# Altium PCB PCB_POWER.PcbDoc (part 1 of 3)
Units mil, origin at the board's own origin, x right, y up, seen from the top; angles counter-clockwise.
Board outline 4410 x 2400 mil, 2 copper layers (Top Layer, Bottom Layer), stack 65.792 mil thick; 97 components, 67 nets, 301 pads, 107 vias.
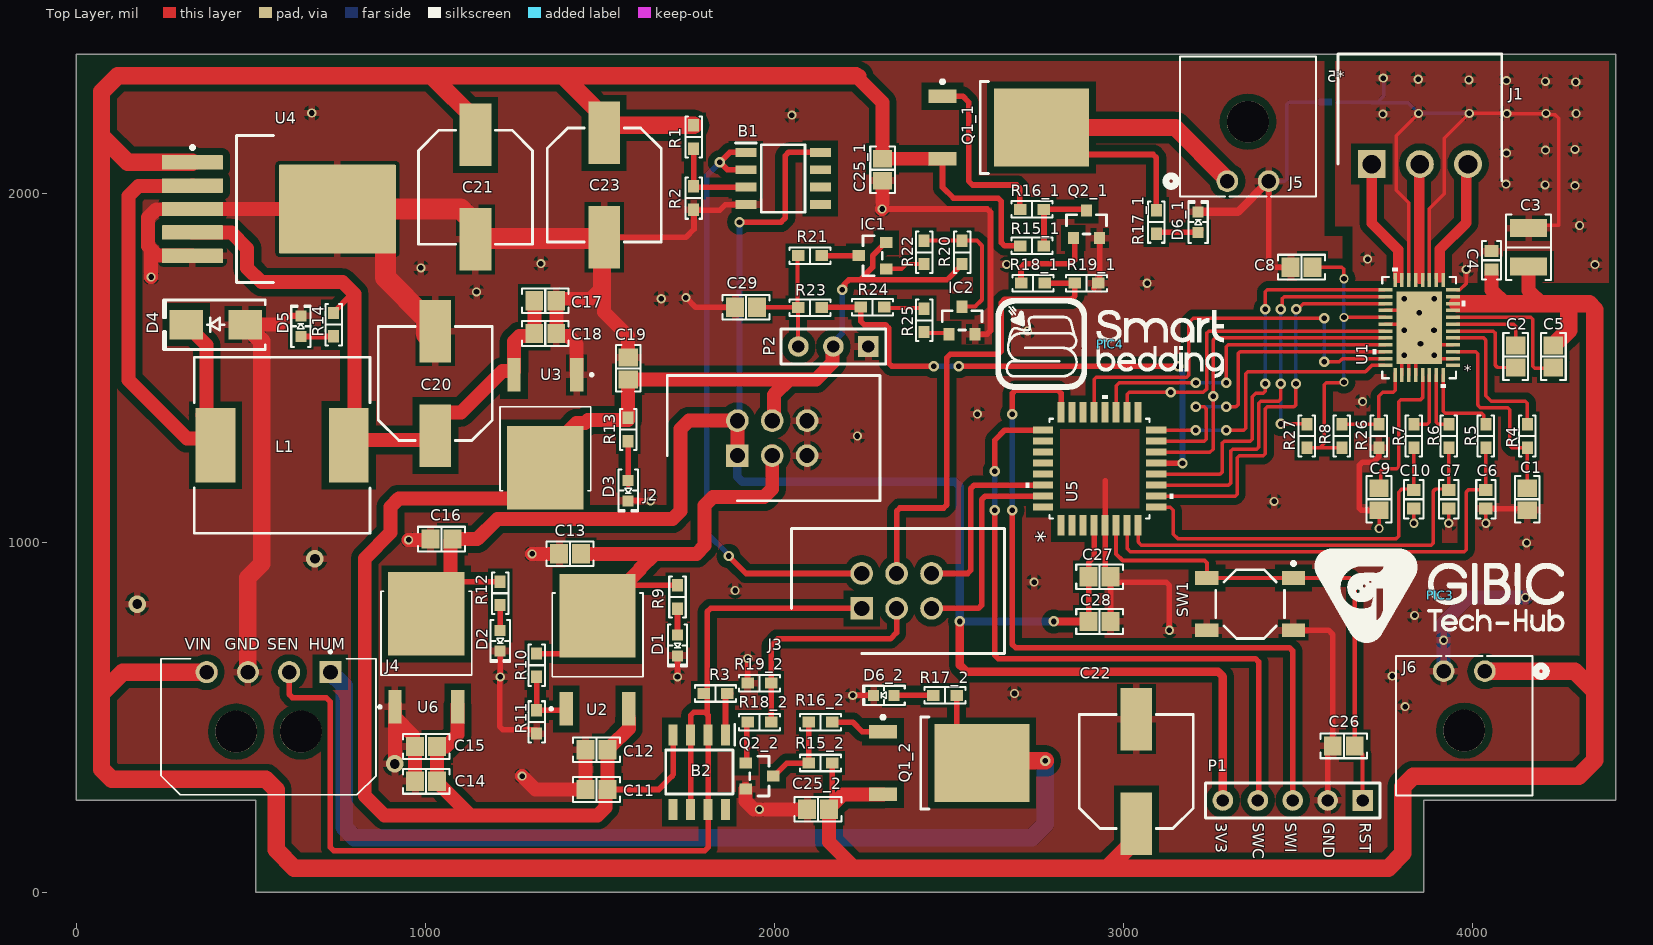
[diagram p0: Top Layer view]
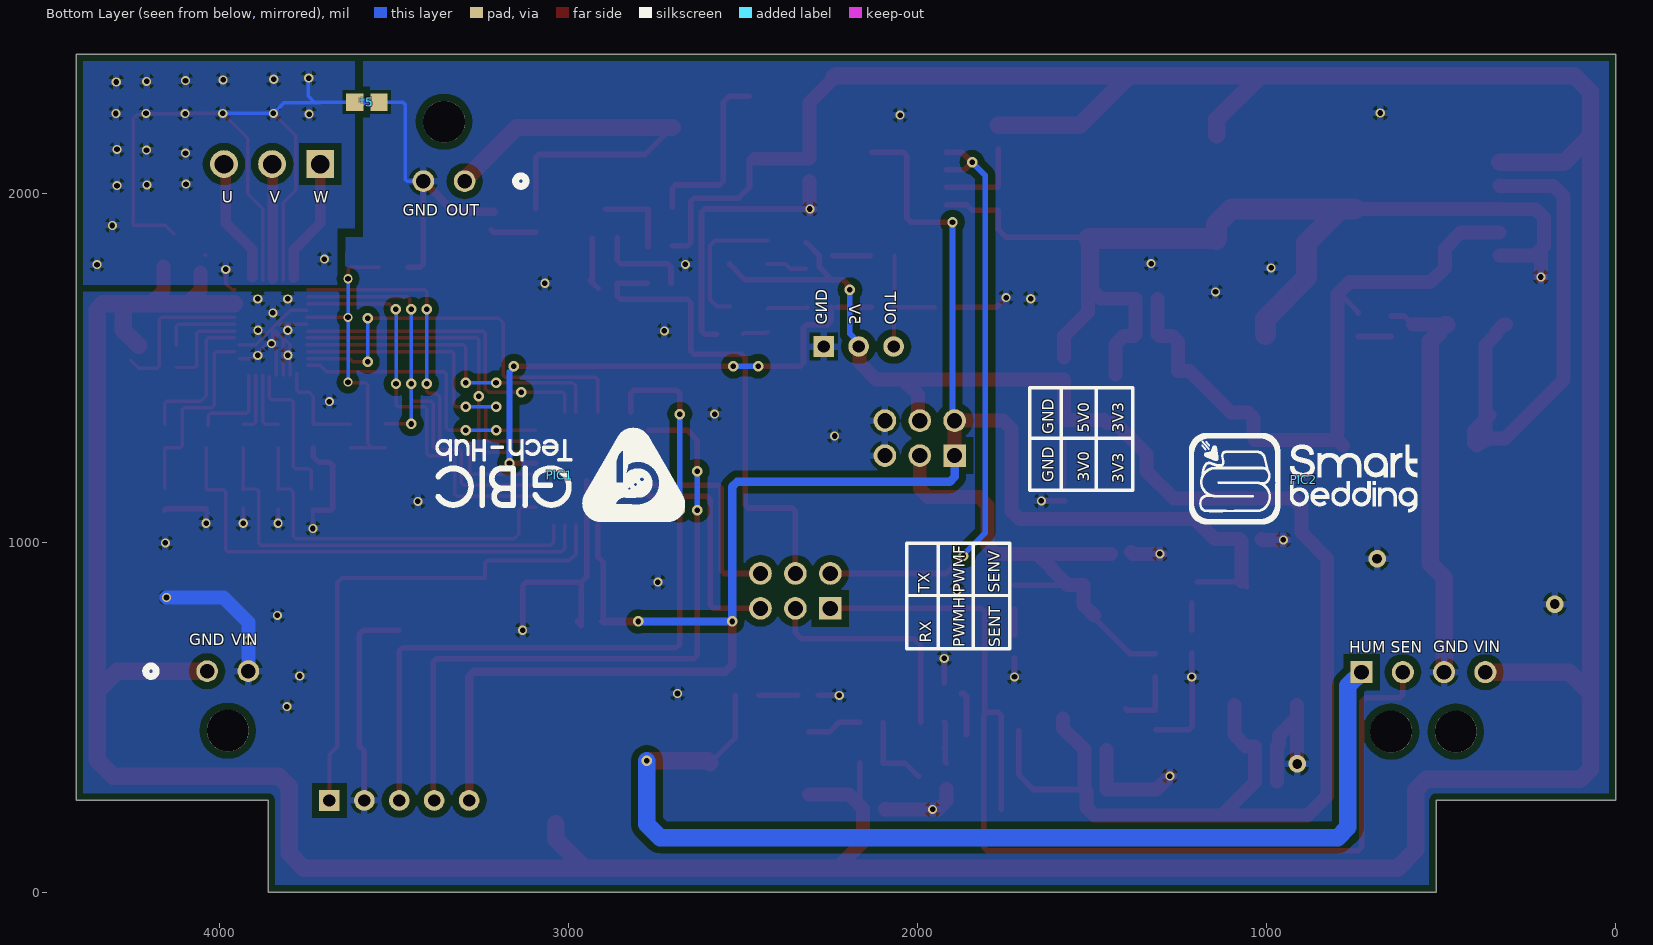
[diagram p1: Bottom Layer view, seen from below]
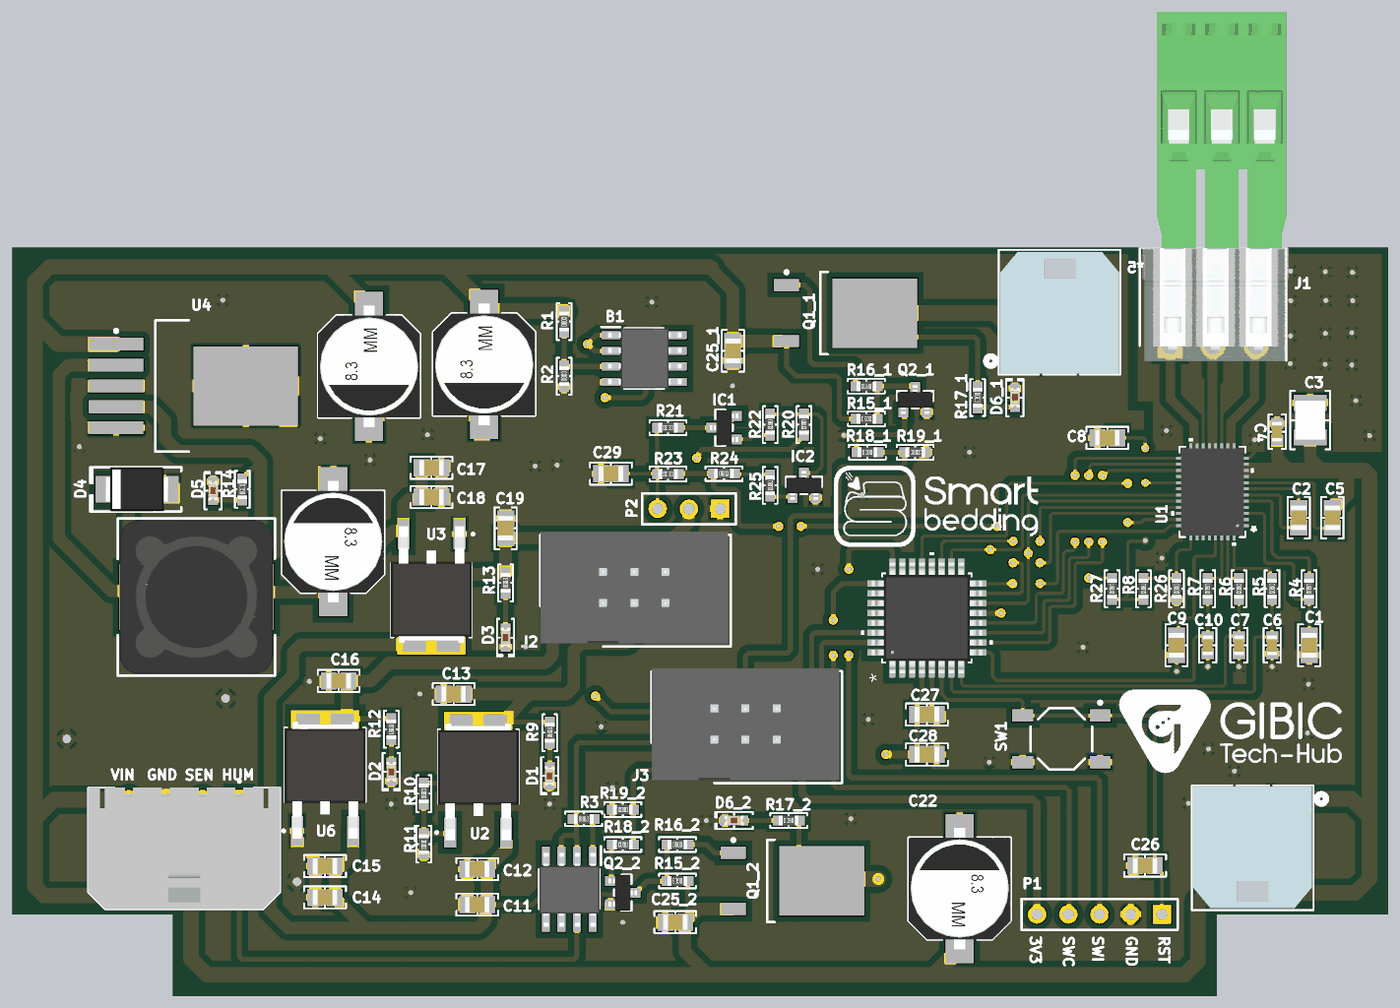
[diagram p3: 3D render of the assembled board from above, using the file's embedded part models]

## Layer stack, top to bottom
Top Solder: solder mask 0.4, Solder Resist, Dk 3.5
Top Layer: signal copper 1.4
Dielectric 1: dielectric 62.992, FR-4, Dk 4.8
Bottom Layer: signal copper 1.4
Bottom Solder: solder mask 0.4, Solder Resist, Dk 3.5

## Board outline
0,262.5 515,262.5 515,0 3860,0 3860,262.5 4410,262.5 4410,2400 0,2400

## Design rules (kind name [scope] priority, off if disabled: settings)
BoardOutlineClearance [All] p1: gap=20 ignorepadtopadclearanceinfootprint=FALSE
Clearance Clearance_1 [All] p1: gap=6 ignorepadtopadclearanceinfootprint=FALSE except(20: Arc-Poly Track-Poly SMDPad-Poly THPad-Poly Via-Poly Fill-Poly Poly-Poly Poly-Region Poly-Text)
Clearance [InNet('GND')] p2: gap=6 ignorepadtopadclearanceinfootprint=FALSE except(20: Arc-Poly Arc-Region Track-Poly Track-Region SMDPad-Poly SMDPad-Region THPad-Poly THPad-Region Via-Poly Via-Region Fill-Poly Fill-Region Poly-Poly Poly-Region Poly-Text Region-Region)
MinimumSolderMaskSliver [All] p1: minsoldermaskwidth=0
PolygonConnect [All] p1: connectstyle=Relief reliefconductorwidth=20 reliefentries=4 polygonreliefangle="90 Angle" airgapwidth=10
RoutingVias [All] p1: holewidth=28 width=56 viastyle="Through Hole" minholewidth=10 minwidth=20 maxholewidth=16 maxwidth=30
SilkToSilkClearance [All] p1: silktosilkclearance=4
SilkToSolderMaskClearance [IsPad] p1: minsilkscreentomaskgap=0 clearancetoexposedcopper=TRUE
SolderMaskExpansion [All] p1: expansion=4 istentingtop=FALSE
Width [All] p1: maxlimit=100 minlimit=10 preferedwidth=16
27 further rules are at their usual default settings.

## Classes and differential pairs
channel class PowerOut: "U_PowerOut 11" "U_PowerOut 12"
component class "U_PowerOut 12": C25_2 D6_2 Q1_2 Q2_2 R15_2 R16_2 R17_2 R18_2 R19_2
component class U_BLDC_ext: C29 IC1 IC2 J6 P2 R20 R21 R22 R23 R24 R25
component class TopLevel: J2 J3 J4 J5 PIC1 PIC2 PIC3 PIC4
component class U_MCU: C26 C27 C28 P1 SW1 U5
component class U_Sensors: *3 B1 B2 R1 R2 R3
component class "U_PowerOut 11": C25_1 D6_1 Q1_1 Q2_1 R15_1 R16_1 R17_1 R18_1 R19_1
component class U_Supply_12V: C20 C21 C22 C23 D4 D5 L1 R14 U4
component class U_Supply_5V0: C17 C18 C19 D3 R13 U3
component class U_Supply_3V3: C14 C15 C16 D2 R12 U6
component class U_Supply_3V0: C11 C12 C13 D1 R9 R10 R11 U2
component class U_BLDC: *5 C1 C2 C3 C4 C5 C6 C7 C8 C9 C10 J1 R4 R5 R6 R7 R8 R26 R27 U1

## Components (designator, comment, footprint, x,y, rotation, side; value= is the part's Value field where it differs from the comment)
*5 "NT_1" Net_Tie 3692.5,2207.57 r180 bottom net-tie
B1 "LM358M" SOIC127P600X175-8N 2025,2043.75 r0 top
B2 "LM334MX" SOIC127P600X175-8N 1784.99,343.75 r270 top
C1 "22µF" "CAP 0805_2012" 4156.25,1125 r270 top
C2 "47 pF" "CAP 0805_2012" 4122.83,1533.89 r270 top
C3 "10µF" "CAP 1210_3225 - 2.8MM" 4159.69,1846.57 r270 top
C4 "0.1 µF" "CAP 0603_1608" 4053.56,1809.46 r90 top
C5 "Value" "CAP 0805_2012" 4230.86,1533.89 r270 top
C6 "33pF" "CAP 0603_1608" 4037.5,1125 r90 top
C7 "33pF" "CAP 0603_1608" 3931.25,1125 r90 top
C8 "Value" "CAP 0805_2012" 3509.61,1789.79 r180 top
C9 "Value" "CAP 0805_2012" 3731.25,1125 r270 top
C10 "33pF" "CAP 0603_1608" 3831.25,1125 r90 top
C11 "10µF" "CAP 0805_2012" 1490.3,293.75 r180 top
C12 "Value" "CAP 0805_2012" 1490.3,407.56 r180 top
C13 "10µF" "CAP 0805_2012" 1414.76,968.75 r180 top
C14 "10µF" "CAP 0805_2012" 1002.63,317.14 r180 top
C15 "Value" "CAP 0805_2012" 1002.63,417.14 r180 top
C16 "10µF" "CAP 0805_2012" 1046.38,1010.89 r180 top
C17 "10µF" "CAP 0805_2012" 1343.75,1693.75 r0 top
C18 "Value" "CAP 0805_2012" 1343.75,1600 r0 top
C19 "10µF" "CAP 0805_2012" 1581.25,1500 r90 top
C20 "220 µF" "CAP ALSMD 8.3MM H10.5MM" 1028.78,1456.69 r90 top
C21 "330 µF" "CAP ALSMD 8.3MM H10.5MM" 1143.75,2018.75 r270 top
C22 "330 µF" "CAP ALSMD 8.3MM H10.5MM" 3036.42,345.47 r90 top
C23 "330 µF" "CAP ALSMD 8.3MM H10.5MM" 1512.5,2025 r270 top
C25_1 "22 µF" "CAP 0805_2012" 2309.83,2068.75 r270 top (schematic designator C25)
C25_2 "22 µF" "CAP 0805_2012" 2125,237.5 r180 top (schematic designator C25)
C26 "0.1 µF" "CAP 0805_2012" 3630.62,418.7 r0 top
C27 "0.1 µF" "CAP 0805_2012" 2931.4,903.25 r180 top
C28 "4.7 µF" "CAP 0805_2012" 2931.4,774.99 r180 top
C29 "4.7 µF" "CAP 0805_2012" 1918.75,1675 r0 top
D1 "Red" "LED 0603_1608 RED" 1722.49,706.25 r270 top
D2 "Red" "LED 0603_1608 RED" 1214.73,719.6 r270 top
D3 "Red" "LED 0603_1608 RED" 1581.25,1149.7 r270 top
D4 "ACDBB540-HF" "DO214AA SMB" 400,1625 r180 top
D5 "Red" "LED 0603_1608 RED" 643.75,1620.47 r90 top
D6_1 "Red" "LED 0603_1608 RED" 3213.48,1918.75 r90 top (schematic designator D6)
D6_2 "Red" "LED 0603_1608 RED" 2313.29,563.43 r180 top (schematic designator D6)
IC1 "NDS0610" "ON SEMI SOT-23-3" 2281.1,1822.44 r180 top
IC2 "2N7002" "ON SEMI SOT-23-3" 2537.5,1637.5 r90 top
J1 "691322110003" SHDRRA3W80P0X350_1X3_1190X920X700P 3710.82,2085 r0 top
J2 "61200621621" SHDR6W64P254_2X3_1528X910X910P 1893.75,1250 r0 top
J3 "61200621621" SHDR6W64P254_2X3_1528X910X910P 2250,812.5 r0 top
J4 "0436500400" MOLEX_0436500400 551.18,459.71 r0 top
J5 "436500200" CONN_SD-43650-001_02_MOL 3297.19,2036.17 r180 top
J6 "436500200" CONN_SD-43650-001_02_MOL 4034.69,632.58 r0 top
L1 "33 µH" "BOURNS SRR1280" 590.13,1279.64 r0 top
P1 "Header 5" HDR1X5 3684.5,262.45 r180 top
P2 "Header 3" HDR1X3 2268.75,1562.5 r180 top
PIC1 "GTH_Silk" TECHHUB_SILK 3025,1193.75 r0 bottom
PIC2 "SB2_Silk" SMARTBEDDING2_SILK 893.75,1181.25 r180 bottom
PIC3 "GTH_Silk" TECHHUB_SILK 3906.25,850 r0 top
PIC4 "SB2_Silk" SMARTBEDDING2_SILK 2962.5,1568.75 r0 top
Q1_1 "IPD068P03L3 G" INF-PG-TO252-3-1_M 2670.23,2189.73 r0 top (schematic designator Q1)
Q1_2 "IPD068P03L3 G" INF-PG-TO252-3-1_M 2500,369.68 r0 top (schematic designator Q1)
Q2_1 "2N7002" "ON SEMI SOT-23-3" 2893.75,1912.5 r90 top (schematic designator Q2)
Q2_2 "2N7002" "ON SEMI SOT-23-3" 1956.99,332.18 r0 top (schematic designator Q2)
R1 "270 kOhms" "YAGEO RES 0603_1608" 1768.75,2162.5 r90 top
R2 "30 kOhms" "YAGEO RES 0603_1608" 1768.75,1987.5 r90 top
R3 "33 Ohms" "YAGEO RES 0603_1608" 1831.53,568.8 r0 top
R4 "22 Ohms" "YAGEO RES 0603_1608" 4156.25,1306.25 r270 top
R5 "1 kOhms" "YAGEO RES 0603_1608" 4037.5,1306.25 r270 top
R6 "1 kOhms" "YAGEO RES 0603_1608" 3931.25,1306.25 r270 top
R7 "1 kOhms" "YAGEO RES 0603_1608" 3831.25,1306.25 r270 top
R8 "47 kOhms" "YAGEO RES 0603_1608" 3625,1306.25 r270 top
R9 "10 kOhms" "YAGEO RES 0603_1608" 1722.49,844.93 r90 top
R10 "120 Ohms" "YAGEO RES 0603_1608" 1318.9,649.66 r90 top
R11 "169 Ohms" "YAGEO RES 0603_1608" 1318.9,487.5 r270 top
R12 "10 kOhms" "YAGEO RES 0603_1608" 1214.73,855.82 r90 top
R13 "10 kOhms" "YAGEO RES 0603_1608" 1581.25,1325 r90 top
R14 "10 kOhms" "YAGEO RES 0603_1608" 737.5,1625 r90 top
R15_1 "10 kOhms" "YAGEO RES 0603_1608" 2737.5,1850.84 r0 top (schematic designator R15)
R15_2 "10 kOhms" "YAGEO RES 0603_1608" 2131.99,369.68 r180 top (schematic designator R15)
R16_1 "47 Ohms" "YAGEO RES 0603_1608" 2737.5,1955.59 r180 top (schematic designator R16)
R16_2 "47 Ohms" "YAGEO RES 0603_1608" 2131.99,486.61 r0 top (schematic designator R16)
R17_1 "10 kOhms" "YAGEO RES 0603_1608" 3093.75,1918.75 r270 top (schematic designator R17)
R17_2 "10 kOhms" "YAGEO RES 0603_1608" 2488.29,563.43 r180 top (schematic designator R17)
R18_1 "47 Ohms" "YAGEO RES 0603_1608" 2740.7,1743.76 r180 top (schematic designator R18)
R18_2 "47 Ohms" "YAGEO RES 0603_1608" 1956.99,486.61 r180 top (schematic designator R18)
R19_1 "10 kOhms" "YAGEO RES 0603_1608" 2893.75,1743.76 r0 top (schematic designator R19)
R19_2 "10 kOhms" "YAGEO RES 0603_1608" 1956.99,598.38 r180 top (schematic designator R19)
R20 "10 kOhms" "YAGEO RES 0603_1608" 2537.5,1832.28 r270 top
R21 "180 Ohms" "YAGEO RES 0603_1608" 2101.69,1822.44 r180 top
R22 "47 Ohms" "YAGEO RES 0603_1608" 2429.04,1832.28 r270 top
R23 "0 Ohms" "YAGEO RES 0603_1608" 2101.69,1673.89 r180 top
R24 "0 Ohms" "YAGEO RES 0603_1608" 2281.1,1675 r0 top
R25 "47 Ohms" "YAGEO RES 0603_1608" 2429.04,1637.5 r270 top
R26 "0 Ohms" "YAGEO RES 0603_1608" 3731.25,1306.25 r270 top
R27 "47 kOhms" "YAGEO RES 0603_1608" 3525,1306.25 r270 top
SW1 "TL3342F160QG" ESWI-TL3342F160QG_V 3362.5,825 r270 top
U1 "DRV8316CTRGFR" VQFN40_RGF_TEX 3846.4,1616.5 r180 top locked
U2 "LD1117DTC-R" DPAK456P1010X240-3N 1493.5,693.75 r90 top
U3 "LD1117DT50CTR" DPAK456P1010X240-3N 1343.75,1312.5 r270 top
U4 "" KTT0005B_M 581.25,1956.25 r0 top
U5 "STM32G030K8T6" LQFP-32 2931.25,1212.5 r90 top
U6 "" DPAK456P1010X240-3N 1003.07,699.13 r90 top

## Footprints (in the part's own frame and the unit in brackets; to place one, negate y for a bottom-side part, rotate by r counter-clockwise, add the part's x,y. Pads: shape width x height; smd on the part's side, far side on the other; paste and mask are expansions set on the pad)
"BOURNS SRR1280" [mm] "Precision Wire Wound Inductor, 2-Leads, Body 12.50x12.50mm, IPC Medium Density"
  rect 2.9x5.4 smd: 1(-4.85,0) 2(4.85,0)
  silkscreen extent -6.4,-6.4 6.4,6.4, body extent -6.25,-6.25 6.25,6.25, height 7.9
"CAP 0603_1608" [mm] "Chip Capacitor, 2-Leads, Body 1.60x0.80mm, IPC Medium Density"
  rect 0.9x1 smd: 1(-0.675,0) 2(0.675,0)
  silkscreen extent -1.4,-0.7 1.4,0.7, body extent -0.8,-0.41 0.8,0.41, height 0.82
"CAP 0805_2012" [mm] "Chip Capacitor, 2-Leads, Body 2.00x1.20mm, IPC Medium Density"
  rect 1.3x1.4 smd: 1(-0.8,0) 2(0.8,0)
  silkscreen extent -1.7,-0.9 1.7,0.9, body extent -1,-0.64 1,0.64, height 1.26
"CAP 1210_3225 - 2.8MM" [mm] "Chip Capacitor, 2-Leads, Body 3.20x2.50mm, IPC Medium Density"
  rect 1.3x2.7 smd: 1(-1.4,0) 2(1.4,0)
  silkscreen extent -2.37,-1.63 2.37,1.63, body extent -1.6,-1.25 1.6,1.25, height 2.8
"CAP ALSMD 8.3MM H10.5MM" [mm] "Aluminum Electrolytic Capacitor, Body 8.30x8.30x10.50mm, IPC Low Density"
  rect 4.55x2.3 smd: 1(-3.8,0) 2(3.8,0)
  silkscreen extent -4.15,-4.15 4.15,4.15, body extent -4.95,-4.15 4.95,4.15, height 10.5
CONN_SD-43650-001_02_MOL [mil]
  round 62 / inner round 60 / far side round 62 hole 42 paste-99999 mask+0: 1(0,0) 2(-118.11,0)
  round 120 / inner round 60 / far side round 120 hole 120 unplated paste-99999 mask-60: 3(-59.06,-170.08)
  silkscreen extent -254,-356 176,44, body extent -250,-350 130,40, height 221
"DO214AA SMB" [mm] "Molded Diode, 2-Leads, Body 4.31x3.62mm, IPC Medium Density"
  rect 2.45x2.15 smd: 1(-2.15,0) 2(2.15,0)
  silkscreen extent -3.6,-1.8 3.8,1.8, body extent -2.6,-1.8 2.6,1.8, height 2.4
DPAK456P1010X240-3N [mm]
  rect 2.44x0.97 smd: 1(-4.29,2.28) 3(-4.29,-2.28)
  rect 6.07x5.55 smd paste-4: 4(2.48,0)
  silkscreen extent -4.39,-3.3 4.14,3.48, body extent -4.95,-3.3 4.58,3.3, height 2.3
ESWI-TL3342F160QG_V [mm] "SMD, 4-Leads, Body 5x5mm, Pitch 6.3mm"
  rect 1x1.7 smd: 1(-1.9,3.15) 2(-1.9,-3.15) 3(1.9,3.15) 4(1.9,-3.15)
  silkscreen extent -3.07,-2.5 2.5,3.28, body extent -2.5,-2.5 2.5,2.5, height 1.5
HDR1X3 [mm] "Connector; Header; 3 Position"
  rect 1.5x1.5 hole 0.9: 1(0,0)
  round 1.5 hole 0.9: 2(2.54,0) 3(5.08,0)
  silkscreen extent -1.27,-1.27 6.35,1.27
HDR1X5 [mm] "Connector; Header; 5 Position"
  rect 1.5x1.5 hole 0.9: 1(0,0)
  round 1.5 hole 0.9: 2(2.54,0) 3(5.08,0) 4(7.62,0) 5(10.16,0)
  silkscreen extent -1.27,-1.27 11.43,1.27
INF-PG-TO252-3-1_M [mm] "DPAK, 3-Leads, Body 6.525x6.12mm, Pitch 2.28mm, IPC Low Density"
  rect 2.05x1 smd: 1(-4.8,2.28) 3(-4.8,-2.28)
  rect 6.9x5.65 smd: 2(2.4,0)
  silkscreen extent -4.92,-3.35 -1.45,3.45, body extent -2.05,-3.32 4.17,3.32, height 2.35
KTT0005B_M [mm] "DPAK, 5-Leads, Body 10.65x9.65mm, Pitch 1.7mm, IPC Low Density"
  rrect10% 4.45x1.05 smd: 1(-6.3,3.4) 2(-6.3,1.7) 3(-6.3,0) 4(-6.3,-1.7) 5(-6.3,-3.4)
  rrect2% 8.5x6.45 smd: 6(4.25,0)
  silkscreen extent -6.42,-5.35 -0.4,5.35, body extent -3.1,-5.32 6.55,5.33, height 4.83
"LED 0603_1608 RED" [mm] "Chip Diode, 2-Leads, Body 1.60x0.80mm, IPC Medium Density"
  rect 0.8x0.8 smd: 1(-0.75,0) 2(0.75,0)
  silkscreen extent -1.52,-0.7 1.52,0.7, body extent -0.8,-0.4 0.8,0.4, height 0.53
LQFP-32 [mil]
  rect 58x20 smd paste+0 mask+0: 1(-162,110.24) 2(-162,78.74) 3(-162,47.24) 4(-162,15.75) 5(-162,-15.75) 6(-162,-47.24) 7(-162,-78.74) 8(-162,-110.24) 17(162,-110.24) 18(162,-78.74) 19(162,-47.24) 20(162,-15.75) 21(162,15.75) 22(162,47.24) 23(162,78.74) 24(162,110.24)
  rect 20x58 smd paste+0 mask+0: 9(-110.24,-162) 10(-78.74,-162) 11(-47.24,-162) 12(-15.75,-162) 13(15.75,-162) 14(47.24,-162) 15(78.74,-162) 16(110.24,-162) 25(110.24,162) 26(78.74,162) 27(47.24,162) 28(15.75,162) 29(-15.75,162) 30(-47.24,162) 31(-78.74,162) 32(-110.24,162)
  silkscreen extent -143,-211 211,211, body extent -177,-177 177,177, height 63
MOLEX_0436500400 [mm]
  rect 1.605x1.605 hole 1.07: 1(4.5,4.32)
  round 1.605 hole 1.07: 2(1.5,4.32) 3(-1.5,4.32) 4(-4.5,4.32)
  round 3.05 hole 3.05 unplated: ""(-2.35,0) ""(2.35,0)
  silkscreen extent -7.83,-4.6 7.83,5.92, body extent -7.83,-4.57 7.83,5.33, height 4.89
Net_Tie [mil]
  rect 50x50 smd: 1(80,55) 2(150,55)
  Top Layer region: 95,65 135,65 135,45 95,45
"ON SEMI SOT-23-3" [mm] "SOT23, 3-Leads, Body 2.90x2.40mm, Pitch 0.95mm, IPC Medium Density"
  rect 0.9x0.8 smd: 1(-1,0.95) 2(-1,-0.95) 3(1,0)
  silkscreen extent -0.7,-1.45 0.7,1.45, body extent -1.16,-1.45 1.16,1.45, height 1
SHDR6W64P254_2X3_1528X910X910P [mm]
  rect 1.65x1.65 / inner round 1.65 / far side rect 1.65x1.65 hole 1.1: 1(0,0)
  round 1.65 hole 1.1: 2(0,2.54) 3(2.54,0) 4(2.54,2.54) 5(5.08,0) 6(5.08,2.54)
  silkscreen extent -5.1,-3.28 10.38,5.82, body extent -5.1,-3.03 10.18,6.07, height 9.1
SHDRRA3W80P0X350_1X3_1190X920X700P [mm]
  rect 2.025x2.025 / inner round 2.025 / far side rect 2.025x2.025 hole 1.35: 1(0,0)
  round 2.025 hole 1.35: 2(3.5,0) 3(7,0)
  silkscreen extent -2.45,-1.2 9.45,8, body extent -2.25,-1.25 9.65,27.16, height 7.7
SMARTBEDDING2_SILK [mil]
  silkscreen extent -329,-128 325,132
SOIC127P600X175-8N [mm]
  rect 1.528x0.65 smd: 1(-2.711,1.905) 2(-2.711,0.635) 3(-2.711,-0.635) 4(-2.711,-1.905) 5(2.711,-1.905) 6(2.711,-0.635) 7(2.711,0.635) 8(2.711,1.905)
  silkscreen extent -3.47,-2.45 1.6,2.58, body extent -2.94,-2.42 3.06,2.48, height 1.75
TECHHUB_SILK [mil]
  silkscreen extent -359,-134 355,133
VQFN40_RGF_TEX [mil]
  rect 40x10 smd paste+0 mask+0: 1(-96.5,108.3) 2(-96.5,88.61) 3(-96.5,68.91) 4(-96.5,49.22) 5(-96.5,29.53) 6(-96.5,9.84) 7(-96.5,-9.84) 8(-96.5,-29.53) 9(-96.5,-49.22) 10(-96.5,-68.91) 11(-96.5,-88.61) 12(-96.5,-108.3) 21(96.5,-108.3) 22(96.5,-88.61) 23(96.5,-68.91) 24(96.5,-49.22) 25(96.5,-29.53) 26(96.5,-9.84) 27(96.5,9.84) 28(96.5,29.53) 29(96.5,49.22) 30(96.5,68.91) 31(96.5,88.61) 32(96.5,108.3)
  rect 10x40 smd paste+0 mask+0: 13(-68.91,-136) 14(-49.22,-136) 15(-29.53,-136) 16(-9.84,-136) 17(9.85,-136) 18(29.53,-136) 19(49.23,-136) 20(68.91,-136) 33(68.91,136) 34(49.23,136) 35(29.53,136) 36(9.85,136) 37(-9.84,136) 38(-29.53,136) 39(-49.22,136) 40(-68.91,136)
  rect 130x208 smd paste-113.5 mask+0: 41(0,0)
  silkscreen extent -132,-172 132,172, body extent -101,-140 101,140, height 39
"YAGEO RES 0603_1608" [mm] "Chip Resistor, 2-Leads, Body 1.60x0.80mm"
  rect 0.9x0.8 smd: 1(-0.85,0) 2(0.85,0)
  silkscreen extent -1.5,-0.6 1.5,0.6, body extent -0.8,-0.4 0.8,0.4, height 0.45

## Part data
B1: "Low Power Dual Operational Amplifiers", Manufacturer_Name="Texas Instruments", Mouser Part Number=926-LM358M, Arrow Part Number=LM358M, Arrow Price/Stock=https://www.arrow.com/en/products/lm358m/texas-instruments?region=nac, Datasheet Link=http://www.ti.com/general/docs/suppproductinfo.tsp?distId=10&gotoUrl=http%3A%2F%2Fwww.ti.com%2Flit%2Fgpn%2Flm158-n, Geometry.Height=1.75mm, Manufacturer_Part_Number=LM358M, Mouser Price/Stock=https://www.mouser.co.uk/ProductDetail/Texas-Instruments/LM358M?qs=QbsRYf82W3HovI3qmwfgKw%3D%3D
B2: "Current & Power Monitors & Regulators 3-Terminal Adjustable Current Source 8-SOIC 0 to 70", Manufacturer_Name="Texas Instruments", Mouser Part Number=926-LM334MX, Datasheet Link=https://www.ti.com/lit/ds/symlink/lm334.pdf?ts=1637153972899&ref_url=https%253A%252F%252Fwww.ti.com%252Fstore%252Fti%252Fen%252Fp%252Fproduct%252F%253Fp%253DLM334MX%252FNOPB, Geometry.Height=1.75mm, Manufacturer_Part_Number=LM334MX, Mouser Price/Stock=https://www.mouser.co.uk/ProductDetail/Texas-Instruments/LM334MX?qs=X1J7HmVL2ZFtDDpPn2fvWQ%3D%3D
C1: library part 0805ZD226MAT2A, "CAP CER 22UF 10V X5R 0805", Device Package="0805 (2012 Metric)", Manufacturer="AVX Corporation", Operating Temperature="-55°C ~ 85°C", Supplier Part Number 1=478-7966-1-ND, Temperature Coefficient=X5R, Tolerance=±20%, Voltage - Rated=10V, Applications="General Purpose", ComponentLink1Description=Datasheet, ComponentLink1URL=http://datasheets.avx.com/cx5r.pdf, ComponentLink2Description="DigiKey Link", ComponentLink2URL=http://digikey.com/product-detail/en/avx-corporation/0805ZD226MAT2A/478-7966-1-ND/3881589, lastupdated="2020-09-02 01:04:32", Lifecycle Status=Active, Minimum Order=1, Mounting Type="Surface Mount, MLCC", Package / Case="0805 (2012 Metric)", Packaging=TapeAndReel, Part Number=0805ZD226MAT2A, Part Status=Active, partid=7750, price=0.10, Series=-, Size / Dimension="0.079\" L x 0.049\" W (2.00mm x 1.25mm)", Supplier 1=DigiKey, Thickness (Max)="0.060\" (1.52mm)"
C2: library part AC0805JRNPO9BN470, "CAP CER 47PF 50V C0G/NPO 0805", Device Package="0805 (2012 Metric)", Manufacturer=Yageo, Operating Temperature="-55°C ~ 125°C", Ratings=AEC-Q200, Supplier Part Number 1=311-3138-1-ND, Temperature Coefficient="C0G, NP0", Tolerance=±5%, Voltage - Rated=50V, Applications=Automotive, ComponentLink1Description=Datasheet, ComponentLink1URL=http://www.yageo.com/NewPortal/_en/search/productDocs.jsp?YageoPartNumber=AC0805JRNPO9BN470, ComponentLink2Description="DigiKey Link", ComponentLink2URL=https://www.digikey.com/en/products/detail/yageo/AC0805JRNPO9BN470/6643124, lastupdated="2024-02-09 20:15:29", Lifecycle Status=Active, Minimum Order=1, Mounting Type="Surface Mount, MLCC", Package / Case="0805 (2012 Metric)", Packaging=TapeAndReel, Part Number=AC0805JRNPO9BN470, Part Status=Active, partid=16022, price=0.02, Series=AC, Size / Dimension="0.079\" L x 0.049\" W (2.00mm x 1.25mm)", Supplier 1=DigiKey, Thickness (Max)="0.028\" (0.70mm)"
C3: library part 1210DD106KAT2A, "CAP CER 10UF 35V X5R 1210", Device Package="1210 (3225 Metric)", Manufacturer="AVX Corporation", Operating Temperature="-55°C ~ 85°C", Supplier Part Number 1=478-12271-1-ND, Temperature Coefficient=X5R, Tolerance=±10%, Voltage - Rated=35V, Applications="General Purpose", Capacitance=10µF, ComponentLink1Description=Datasheet, ComponentLink1URL=http://datasheets.avx.com/cx5r.pdf, ComponentLink2Description="DigiKey Link", ComponentLink2URL=http://digikey.com/product-detail/en/avx-corporation/1210DD106KAT2A/478-12271-1-ND/9565678, lastupdated="2020-09-02 01:10:50", Lifecycle Status=Active, Minimum Order=1, Mounting Type="Surface Mount, MLCC", Package / Case="1210 (3225 Metric)", Packaging=TapeAndReel, Part Number=1210DD106KAT2A, Part Status=Active, partid=23974, price=0.66, Series=-, Size / Dimension="0.126\" L x 0.098\" W (3.20mm x 2.50mm)", Supplier 1=DigiKey, Thickness (Max)="0.110\" (2.79mm)"
C4: library part GMJ107BB7104KAHT, "CAP CER 0.1UF 35V X7R 0603", Device Package="0603 (1608 Metric)", Manufacturer="Taiyo Yuden", Operating Temperature="-55°C ~ 125°C", Ratings=AEC-Q200, Supplier Part Number 1=587-4467-1-ND, Temperature Coefficient=X7R, Tolerance=±10%, Voltage - Rated=35V, Applications="Automotive, Boardflex Sensitive", ComponentLink1Description=Datasheet, ComponentLink1URL="https://ds.yuden.co.jp/TYCOMPAS/ut/detail?pn=GMJ107BB7104KAHT &u=M", ComponentLink2Description="DigiKey Link", ComponentLink2URL=https://www.digikey.com/en/products/detail/taiyo-yuden/GMJ107BB7104KAHT/5880015, Features="Soft Termination", lastupdated="2024-02-09 20:10:10", Lifecycle Status=Active, Minimum Order=1, Mounting Type="Surface Mount, MLCC", Package / Case="0603 (1608 Metric)", Packaging=TapeAndReel, Part Number=GMJ107BB7104KAHT, Part Status=Active, partid=16165, price=0.04, Series=M, Size / Dimension="0.063\" L x 0.031\" W (1.60mm x 0.80mm)", Supplier 1=DigiKey, Thickness (Max)="0.039\" (1.00mm)"
C5 C8: library part CC0805MKY5V9BB105, "CAP CER 1UF 50V Y5V 0805", Capacitance="1 µF", Device Package="0805 (2012 Metric)", Manufacturer=Yageo, Operating Temperature="-30°C ~ 85°C", Supplier Part Number 1=311-3435-1-ND, Temperature Coefficient="Y5V (F)", Tolerance=±20%, Voltage - Rated=50V, Applications="General Purpose", ComponentLink1Description=Datasheet, ComponentLink1URL=http://www.yageo.com/documents/recent/UPY-GPHC_Y5V_6.3V-to-50V_8.pdf, ComponentLink2Description="DigiKey Link", ComponentLink2URL=https://www.digikey.com/en/products/detail/yageo/CC0805MKY5V9BB105/5884272, lastupdated="2024-02-09 20:15:56", Lifecycle Status=Active, Minimum Order=1, Mounting Type="Surface Mount, MLCC", Package / Case="0805 (2012 Metric)", Packaging=TapeAndReel, Part Number=CC0805MKY5V9BB105, Part Status=Active, partid=7367, price=0.03, Series=CC, Size / Dimension="0.079\" L x 0.049\" W (2.00mm x 1.25mm)", Supplier 1=DigiKey, Thickness (Max)="0.057\" (1.45mm)"
C6 C7 C10: library part 0603YC330JAT2A, "CAP CER 33PF 16V X7R 0603", Device Package="0603 (1608 Metric)", Manufacturer="AVX Corporation", Operating Temperature="-55°C ~ 125°C", Supplier Part Number 1=478-6211-1-ND, Temperature Coefficient=X7R, Tolerance=±5%, Voltage - Rated=16V, Applications="General Purpose", ComponentLink1Description=Datasheet, ComponentLink1URL=http://datasheets.avx.com/X7RDielectric.pdf, ComponentLink2Description="DigiKey Link", ComponentLink2URL=http://digikey.com/product-detail/en/avx-corporation/0603YC330JAT2A/478-6211-1-ND/2391410, lastupdated="2020-09-02 01:03:19", Lifecycle Status=Active, Minimum Order=1, Mounting Type="Surface Mount, MLCC", Package / Case="0603 (1608 Metric)", Packaging=TapeAndReel, Part Number=0603YC330JAT2A, Part Status=Active, partid=11539, price=0.03, Series=-, Size / Dimension="0.063\" L x 0.032\" W (1.60mm x 0.81mm)", Supplier 1=DigiKey, Thickness (Max)="0.035\" (0.90mm)"
C9 C12 C15 C18: library part 08053E104ZAT2A, "CAP CER 0.1UF 25V Z5U 0805", Capacitance=0.1µF, Device Package="0805 (2012 Metric)", Manufacturer="AVX Corporation", Operating Temperature="10°C ~ 85°C", Supplier Part Number 1=478-12769-1-ND, Temperature Coefficient=Z5U, Tolerance="-20%, +80%", Voltage - Rated=25V, Applications="General Purpose", ComponentLink2Description="DigiKey Link", ComponentLink2URL=http://digikey.com/product-detail/en/avx-corporation/08053E104ZAT2A/478-12769-1-ND/9949310, lastupdated="2020-09-02 01:04:40", Lifecycle Status=Active, Minimum Order=1, Mounting Type="Surface Mount, MLCC", Package / Case="0805 (2012 Metric)", Packaging=TapeAndReel, Part Number=08053E104ZAT2A, Part Status=Active, partid=3602, price=0.04, Series=-, Size / Dimension="0.079\" L x 0.049\" W (2.00mm x 1.25mm)", Supplier 1=DigiKey, Thickness (Max)="0.037\" (0.94mm)"
C11 C13 C14 C16 C17 C19: library part 0805YD106KAT2A, "CAP CER 10UF 16V X5R 0805", Device Package="0805 (2012 Metric)", Manufacturer="AVX Corporation", Operating Temperature="-55°C ~ 85°C", Supplier Part Number 1=478-5165-1-ND, Temperature Coefficient=X5R, Tolerance=±10%, Voltage - Rated=16V, Applications="General Purpose", ComponentLink1Description=Datasheet, ComponentLink1URL=http://datasheets.avx.com/cx5r.pdf, ComponentLink2Description="DigiKey Link", ComponentLink2URL=http://digikey.com/product-detail/en/avx-corporation/0805YD106KAT2A/478-5165-1-ND/1913255, lastupdated="2020-09-02 01:04:16", Lifecycle Status=Active, Minimum Order=1, Mounting Type="Surface Mount, MLCC", Package / Case="0805 (2012 Metric)", Packaging=TapeAndReel, Part Number=0805YD106KAT2A, Part Status=Active, partid=15295, price=0.16, Series=-, Size / Dimension="0.079\" L x 0.049\" W (2.01mm x 1.25mm)", Supplier 1=DigiKey, Thickness (Max)="0.055\" (1.40mm)"
C20: library part 25SKV220M8X10.5, "CAP ALUM 220UF 20% 25V SMD", Device Package="Radial, Can - SMD", Lifetime @ Temp.="1000 Hrs @ 105°C", Manufacturer=Rubycon, Operating Temperature="-55°C ~ 105°C", Ripple Current @ High Frequency="228 mA @ 10 kHz", Ripple Current @ Low Frequency="190 mA @ 120 Hz", Supplier Part Number 1=1189-3082-1-ND, Tolerance=±20%, Voltage - Rated="25 V", Applications="General Purpose", Capacitance="220 µF", ComponentLink1Description=Datasheet, ComponentLink1URL=http://www.rubycon.co.jp/en/catalog/e_pdfs/aluminum/e_SKV.pdf, ComponentLink2Description="DigiKey Link", ComponentLink2URL=https://www.digikey.com/en/products/detail/rubycon/25SKV220M8X10-5/3568724, Height - Seated (Max)="0.413\" (10.50mm)", lastupdated="2024-06-03 20:15:46", Lifecycle Status=Active, Minimum Order=1, Mounting Type="Surface Mount", Package / Case="Radial, Can - SMD", Packaging=TapeAndReel, Part Number=25SKV220M8X10.5, Part Status=Active, partid=7651, Polarization=Polar, price=0.12, Series=SKV, Size / Dimension="0.315\" Dia (8.00mm)", Supplier 1=DigiKey, Surface Mount Land Size="0.327\" L x 0.327\" W (8.30mm x 8.30mm)"
C21 C22 C23: library part EMZS350ARA331MHA0G, "CAP ALUM 330UF 20% 35V SMD", Device Package="Radial, Can - SMD", ESR (Equivalent Series Resistance)="80mOhm @ 100kHz", Lifetime @ Temp.="2000 Hrs @ 105°C", Manufacturer="United Chemi-Con", Operating Temperature="-55°C ~ 105°C", Ratings=AEC-Q200, Ripple Current @ High Frequency="850 mA @ 100 kHz", Ripple Current @ Low Frequency="425 mA @ 120 Hz", Supplier Part Number 1=565-5121-1-ND, Tolerance=±20%, Voltage - Rated="35 V", Applications=Automotive, Capacitance="330 µF", ComponentLink1Description=Datasheet, ComponentLink1URL=//media.digikey.com/pdf/Data%20Sheets/United%20Chemi-Con%20PDFs/MZS_Series_NPI.pdf, ComponentLink2Description="DigiKey Link", ComponentLink2URL=https://www.digikey.com/en/products/detail/united-chemi-con/EMZS350ARA331MHA0G/8637077, Height - Seated (Max)="0.413\" (10.50mm)", lastupdated="2024-06-03 20:15:47", Lifecycle Status=Active, Minimum Order=1, Mounting Type="Surface Mount", Package / Case="Radial, Can - SMD", Packaging=TapeAndReel, Part Number=EMZS350ARA331MHA0G, Part Status=Active, partid=7592, Polarization=Polar, price=0.30, Series="Alchip™- MZS", Size / Dimension="0.315\" Dia (8.00mm)", Supplier 1=DigiKey, Surface Mount Land Size="0.327\" L x 0.327\" W (8.30mm x 8.30mm)"
C25_1 C25_2: library part GMC21X5R226M35NT, "CAP0805 X5R 22UF 20% 35V", Device Package="0805 (2012 Metric)", Manufacturer="Cal-Chip Electronics, Inc.", Operating Temperature="-55°C ~ 85°C", Supplier Part Number 1=4713-GMC21X5R226M35NTCT-ND, Temperature Coefficient=X5R, Tolerance=±20%, Voltage - Rated=35V, Applications="General Purpose", ComponentLink1Description=Datasheet, ComponentLink1URL=https://88ce57.p3cdn1.secureserver.net/wp-content/uploads/2023/01/gmc_series-2.pdf, ComponentLink2Description="DigiKey Link", ComponentLink2URL=https://www.digikey.com/en/products/detail/cal-chip-electronics-inc/GMC21X5R226M35NT/18151151, lastupdated="2024-02-09 20:14:42", Lifecycle Status=Active, Minimum Order=1, Mounting Type="Surface Mount, MLCC", Package / Case="0805 (2012 Metric)", Packaging=TapeAndReel, Part Number=GMC21X5R226M35NT, Part Status=Active, partid=49838, price=0.21, Series=GMC, Size / Dimension="0.079\" L x 0.049\" W (2.00mm x 1.25mm)", Supplier 1=DigiKey, Thickness (Max)="0.057\" (1.45mm)"
C26 C27: library part CC0805KRX7R7BB104, "CAP CER 0.1UF 16V X7R 0805", Device Package="0805 (2012 Metric)", Manufacturer=Yageo, Operating Temperature="-55°C ~ 125°C", Supplier Part Number 1=311-1142-1-ND, Temperature Coefficient=X7R, Tolerance=±10%, Voltage - Rated=16V, Applications="General Purpose", Capacitance="0.1 µF", ComponentLink1Description=Datasheet, ComponentLink1URL=https://www.yageo.com/upload/media/product/productsearch/datasheet/mlcc/UPY-GPHC_X7R_6.3V-to-50V_18.pdf, ComponentLink2Description="DigiKey Link", ComponentLink2URL=https://www.digikey.com/en/products/detail/yageo/CC0805KRX7R7BB104/302876, Features="High Voltage", lastupdated="2024-02-09 20:15:42", Lifecycle Status=Active, Minimum Order=1, Mounting Type="Surface Mount, MLCC", Package / Case="0805 (2012 Metric)", Packaging=TapeAndReel, Part Number=CC0805KRX7R7BB104, Part Status=Active, partid=12765, price=0.01, Series=CC, Size / Dimension="0.079\" L x 0.049\" W (2.00mm x 1.25mm)", Supplier 1=DigiKey, Thickness (Max)="0.033\" (0.85mm)"
C28: library part CC0805KRX5R6BB475, "CAP CER 4.7UF 10V X5R 0805", Device Package="0805 (2012 Metric)", Manufacturer=Yageo, Operating Temperature="-55°C ~ 85°C", Supplier Part Number 1=311-3426-1-ND, Temperature Coefficient=X5R, Tolerance=±10%, Voltage - Rated=10V, Applications="General Purpose", Capacitance="4.7 µF", ComponentLink1Description=Datasheet, ComponentLink1URL=https://www.yageo.com/upload/media/product/productsearch/datasheet/mlcc/UPY-GPHC_X5R_4V-to-50V_25.pdf, ComponentLink2Description="DigiKey Link", ComponentLink2URL=https://www.digikey.com/en/products/detail/yageo/CC0805KRX5R6BB475/5884183, lastupdated="2024-02-09 20:15:46", Lifecycle Status=Active, Minimum Order=1, Mounting Type="Surface Mount, MLCC", Package / Case="0805 (2012 Metric)", Packaging=TapeAndReel, Part Number=CC0805KRX5R6BB475, Part Status=Active, partid=11449, price=0.07, Series=CC, Size / Dimension="0.079\" L x 0.049\" W (2.00mm x 1.25mm)", Supplier 1=DigiKey, Thickness (Max)="0.057\" (1.45mm)"
C29: library part C0805X475J9RACAUTO, "CAP CER 4.7UF 6.3V X7R 0805", Device Package="0805 (2012 Metric)", Manufacturer=KEMET, Operating Temperature="-55°C ~ 125°C", Ratings=AEC-Q200, Supplier Part Number 1=399-15727-1-ND, Temperature Coefficient=X7R, Tolerance=±5%, Voltage - Rated=6.3V, Applications="Automotive, Boardflex Sensitive", ComponentLink1Description=Datasheet, ComponentLink1URL=https://api.kemet.com/component-edge/download/datasheet/C0805X475J9RACAUTO.pdf, ComponentLink2Description="DigiKey Link", ComponentLink2URL=https://www.digikey.com/en/products/detail/kemet/C0805X475J9RACAUTO/7427557, Features="Soft Termination", lastupdated="2024-02-09 20:16:08", Lifecycle Status=Active, Minimum Order=1, Mounting Type="Surface Mount, MLCC", Package / Case="0805 (2012 Metric)", Packaging=TapeAndReel, Part Number=C0805X475J9RACAUTO, Part Status=Active, partid=2889, price=0.20, Series="SMD Auto X7R Flex", Size / Dimension="0.079\" L x 0.049\" W (2.00mm x 1.25mm)", Supplier 1=DigiKey, Thickness (Max)="0.057\" (1.45mm)"
D1 D2 D3 D5 D6_1 D6_2: library part "LR Q976.01-P2R2-1", "LED RED CLEAR 0603 SMD", Current - Test=20mA, Device Package="0603 (1608 Metric)", Lens Color=Colorless, Manufacturer="ams-OSRAM USA Inc.", Millicandela Rating=118mcd, Supplier Device Package=0603, Supplier Part Number 1=475-LRQ976.01-P2R2-1CT-ND, Voltage - Forward (Vf) (Typ)=2V, Color=Red, ComponentLink2Description="DigiKey Link", ComponentLink2URL=https://www.digikey.com/en/products/detail/ams-osram-usa-inc/LR-Q976-01-P2R2-1/21556490, Height (Max)=0.75mm, lastupdated="2024-06-03 19:59:37", Lens Size="1.10mm x 0.80mm", Lens Style="Rectangle with Flat Top", Lens Transparency=Clear, Lifecycle Status=Active, Minimum Order=1, Mounting Type="Surface Mount", Package / Case="0603 (1608 Metric)", Packaging=TapeAndReel, Part Number="LR Q976.01-P2R2-1", partid=1467, price=0.02, Series="LO Q976.01", Size / Dimension="1.60mm L x 0.80mm W", Supplier 1=DigiKey, Viewing Angle=140°, Wavelength - Dominant=623nm, Wavelength - Peak=628nm
D4: "DIODE SCHOTTKY 40V 5A DO214AA", Capacitance @ Vr, F="300pF @ 4V, 1MHz", Current - Average Rectified (Io)=5A, Current - Reverse Leakage @ Vr="500 µA @ 40 V", Manufacturer="Comchip Technology", Operating Temperature - Junction="-55°C ~ 125°C", Package / Case="DO-214AA, SMB", Supplier Device Package="DO-214AA (SMB)", Supplier Part Number 1=641-1898-1-ND, Voltage - DC Reverse (Vr) (Max)="40 V", Voltage - Forward (Vf) (Max) @ If="550 mV @ 5 A", ComponentLink1Description=Datasheet, ComponentLink1URL=http://www.comchiptech.com/admin/files/product/ACDBB540-HF%20RevA196617.pdf, ComponentLink2Description="DigiKey Link", ComponentLink2URL=https://www.digikey.com/en/products/detail/comchip-technology/ACDBB540-HF/7100744, Diode Type=Schottky, lastupdated="2024-06-03 19:54:00", Lifecycle Status=Active, Minimum Order=1, Mounting Type="Surface Mount", Packaging=TapeAndReel, Part Number=ACDBB540-HF, Part Status=Active, partid=1496, price=0.18, Series=-, Speed="Fast Recovery =< 500ns, > 200mA (Io)", Supplier 1=DigiKey
IC1: "MOSFET P-CH 60V 120MA SOT-23", Current - Continuous Drain (Id) @ 25°C="120mA (Ta)", Drain to Source Voltage (Vdss)=60V, Drive Voltage (Max Rds On,  Min Rds On)="4.5V, 10V", Input Capacitance (Ciss) (Max) @ Vds="79pF @ 25V", Manufacturer="ON Semiconductor", Operating Temperature="-55°C ~ 150°C (TJ)", Package / Case="TO-236-3, SC-59, SOT-23-3", Power Dissipation (Max)="360mW (Ta)", Supplier Device Package=SOT-23, Supplier Part Number 1=NDS0610CT-ND, ComponentLink1Description=Datasheet, ComponentLink1URL=https://www.onsemi.com/pub/Collateral/NDS0610-D.PDF, ComponentLink2Description="DigiKey Link", ComponentLink2URL=http://digikey.com/product-detail/en/on-semiconductor/NDS0610/NDS0610CT-ND/244299, FET Type=P-Channel, Gate Charge (Qg) (Max) @ Vgs="2.5nC @ 10V", lastupdated="2024-06-03 20:15:27", Lifecycle Status=Active, Minimum Order=1, Mounting Type="Surface Mount", Packaging=TapeAndReel, Part Number=NDS0610, Part Status=Active, price=0.06, Rds On (Max) @ Id, Vgs="10Ohm @ 500mA, 10V", Series=-, Supplier 1=DigiKey, Technology="MOSFET (Metal Oxide)", Vgs (Max)=±20V, Vgs(th) (Max) @ Id="3.5V @ 1mA"
IC2 Q2_1 Q2_2: "MOSFET N-CH 60V 115MA SOT-23", Current - Continuous Drain (Id) @ 25°C="115mA (Ta)", Drain to Source Voltage (Vdss)=60V, Drive Voltage (Max Rds On,  Min Rds On)="5V, 10V", Input Capacitance (Ciss) (Max) @ Vds="50pF @ 25V", Manufacturer="ON Semiconductor", Operating Temperature="-55°C ~ 150°C (TJ)", Package / Case="TO-236-3, SC-59, SOT-23-3", Power Dissipation (Max)="200mW (Ta)", Supplier Device Package="SOT-23 (TO-236AB)", Supplier Part Number 1=2N7002NCT-ND, ComponentLink1Description=Datasheet, ComponentLink1URL=https://www.onsemi.com/pub/Collateral/NDS7002A-D.PDF, ComponentLink2Description="DigiKey Link", ComponentLink2URL=http://digikey.com/product-detail/en/on-semiconductor/2N7002/2N7002NCT-ND/244664, FET Type=N-Channel, lastupdated="2024-06-03 20:15:26", Lifecycle Status=Active, Minimum Order=1, Mounting Type="Surface Mount", Packaging=TapeAndReel, Part Number=2N7002, Part Status=Active, price=0.06, Rds On (Max) @ Id, Vgs="7.5Ohm @ 500mA, 10V", Series=-, Supplier 1=DigiKey, Technology="MOSFET (Metal Oxide)", Vgs (Max)=±20V, Vgs(th) (Max) @ Id="2.5V @ 250µA"
J1: "Pluggable Terminal Block Wurth Elektronik 3221 Series 3.5mm Pitch, 3 Way Straight, PCB Header, Through Hole", Manufacturer_Name="Wurth Elektronik", Mouser Part Number=710-691322110003, Datasheet Link=http://katalog.we-online.de/em/datasheet/6913221100xx.pdf, Geometry.Height=7mm, Manufacturer_Part_Number=691322110003, Mouser Price/Stock=https://www.mouser.co.uk/ProductDetail/Wurth-Elektronik/691322110003?qs=E2PpAYvlWVuH5qLC1GE%2FCQ%3D%3D
J2 J3: "Wurth Elektronik PCB Header WR-BHD, 6 Way, 2.54mm Pitch, 2 Row, Straight, Through Hole", Manufacturer_Name="Wurth Elektronik", Mouser Part Number=710-61200621621, Datasheet Link=https://katalog.we-online.de/em/datasheet/6120xx21621.pdf, Geometry.Height=9.1mm, Manufacturer_Part_Number=61200621621, Mouser Price/Stock=https://www.mouser.co.uk/ProductDetail/Wurth-Elektronik/61200621621?qs=PhR8RmCirEbjX8n1RKw4Jw%3D%3D
J4: "Micro-fit 3.0 Connector, 4 Circuit Single Row, Right Angle Throughhole PCB, Snap-In Peg", Package=None, Availability=Unavailable, MF=Molex, MP=0436500400, price=None, SnapEDA_Link=https://www.snapeda.com/parts/0436500400/Molex/view-part/1776823/?ref=snap
J5 J6: "No Description Available", Mfr_Name="Molex Connector Corporation", RefDes=RefDes, Type=Type
L1: library part SRR1280-330M, "FIXED IND 33UH 3.5A 57 MOHM SMD", Current - Saturation=3.3A, Current Rating (Amps)="3.5 A", DC Resistance (DCR)="57mOhm Max", Device Package=Nonstandard, Frequency - Self Resonant=9.5MHz, Inductance Frequency - Test="100 kHz", Manufacturer="Bourns Inc.", Operating Temperature="-40°C ~ 125°C", Q @ Freq="28 @ 2.52MHz", Supplier Part Number 1=SRR1280-330MCT-ND, Tolerance=±20%, ComponentLink1Description=Datasheet, ComponentLink1URL=https://www.bourns.com/docs/Product-Datasheets/SRR1280.pdf, ComponentLink2Description="DigiKey Link", ComponentLink2URL=https://www.digikey.com/en/products/detail/bourns-inc/SRR1280-330M/1969998, Height - Seated (Max)="0.315\" (8.00mm)", Inductance="33 µH", lastupdated="2024-11-25 00:45:31", Lifecycle Status=Active, Material - Core=Ferrite, Minimum Order=1, Mounting Type="Surface Mount", Package / Case=Nonstandard, Packaging=TapeAndReel, Part Number=SRR1280-330M, Part Status=Active, partid=25, price=0.45, Series=SRR1280, Shielding=Shielded, Size / Dimension="0.492\" L x 0.492\" W (12.50mm x 12.50mm)", Supplier 1=DigiKey, Type="Drum Core, Wirewound"
P1: "Header, 5-Pin", LatestRevisionDate=17-Jul-2002, LatestRevisionNote="Re-released for DXP Platform.", Publisher="Altium Limited"
P2: "Header, 3-Pin", LatestRevisionDate=17-Jul-2002, LatestRevisionNote="Re-released for DXP Platform.", Publisher="Altium Limited"
Q1_1 Q1_2: "P-Channel OptiMOS P3 Power-Transistor, -30 V VDS, -70 A ID, -55 to 175 degC, PG-TO252-3-1, Reel, Green", Manufacturer=Infineon, ComponentLink1Description="Manufacturer URL", ComponentLink1URL=http://www.infineon.com/, ComponentLink2Description=Datasheet, ComponentLink2URL=http://www.infineon.com/dgdl/IPD068P03L3+G_2+0.pdf?folderId=db3a304314dca38901154a7313d21a66&fileId=db3a30432313ff5e01232cc234f07d94, ComponentLink3Description="Package Specification", ComponentLink3URL=http://www.infineon.com/dgdl/TLE42744_DS_11.pdf?folderId=db3a304318f3fe290118f5a433570040&fileId=db3a304327b897500128012ccafe37d2&sId=db3a30443d67b5ca013d83f7c0ea327b, DatasheetVersion="Rev. 2.0", Green=TRUE, ID (max)="-70Â A", IDpuls (max)="-280Â A", Mounting Technology="Surface Mount", PackageDescription="3-Pin Plastic (Green) Transistor Single Outline Package, 6.5 x 6.12 mm Body, 2.28 mm Pitch", PackageReference=PG-TO252-3-1, PackageVersion=Jan-10, Packing=Reel, PartNumber="IPD068P03L3 G", Pto t (max)="100Â W", QG="68Â nC", RDS (on) (max)="6.8Â mOhm", RDS (on) (max) (@4.5V)="11Â mOhm", Rth="1.5Â K/W", RthJC (max)="1.5 K/W", VDS (max)="-30Â V", VGS(th) (max)="-2Â V", VGS(th) (min)="-1Â V"
R1: library part RC0603FR-07270KL, "RES 270K OHM 1% 1/10W 0603", Device Package="0603 (1608 Metric)", Manufacturer=Yageo, Operating Temperature="-55°C ~ 155°C", Power (Watts)="0.1W, 1/10W", Supplier Device Package=0603, Supplier Part Number 1=311-270KHRCT-ND, Temperature Coefficient=±100ppm/°C, Tolerance=±1%, ComponentLink1Description=Datasheet, ComponentLink1URL=https://www.yageo.com/upload/media/product/productsearch/datasheet/rchip/PYu-RC_Group_51_RoHS_L_10.pdf, ComponentLink2Description="DigiKey Link", ComponentLink2URL=https://www.digikey.com/en/products/detail/yageo/RC0603FR-07270KL/727104, Composition="Thick Film", Features="Moisture Resistant", Height - Seated (Max)="0.022\" (0.55mm)", lastupdated="2024-07-25 09:19:27", Lifecycle Status=Active, Minimum Order=1, Number of Terminations=2, Package / Case="0603 (1608 Metric)", Packaging=CutTape, Part Number=RC0603FR-07270KL, Part Status=Active, partid=12358, price=0.01, Resistance="270 kOhms", Series=RC_L, Size / Dimension="0.063\" L x 0.031\" W (1.60mm x 0.80mm)", Supplier 1=DigiKey
R2: library part AC0603FR-0730KL, "RES SMD 30K OHM 1% 1/10W 0603", Device Package="0603 (1608 Metric)", Manufacturer=Yageo, Operating Temperature="-55°C ~ 155°C", Power (Watts)="0.1W, 1/10W", Ratings=AEC-Q200, Supplier Device Package=0603, Supplier Part Number 1=YAG3593CT-ND, Temperature Coefficient=±100ppm/°C, Tolerance=±1%, ComponentLink1Description=Datasheet, ComponentLink1URL=https://www.yageo.com/upload/media/product/productsearch/datasheet/rchip/PYu-AC_51_RoHS_L_7.pdf, ComponentLink2Description="DigiKey Link", ComponentLink2URL=https://www.digikey.com/en/products/detail/yageo/AC0603FR-0730KL/5896025, Composition="Thick Film", Features="Automotive AEC-Q200, Moisture Resistant", Height - Seated (Max)="0.022\" (0.55mm)", lastupdated="2024-07-25 09:19:23", Lifecycle Status=Active, Minimum Order=1, Number of Terminations=2, Package / Case="0603 (1608 Metric)", Packaging=CutTape, Part Number=AC0603FR-0730KL, Part Status=Active, partid=17451, price=0.01, Resistance="30 kOhms", Series=AC, Size / Dimension="0.063\" L x 0.031\" W (1.60mm x 0.80mm)", Supplier 1=DigiKey
R3: library part RC0603JR-0733RL, "RES 33 OHM 5% 1/10W 0603", Device Package="0603 (1608 Metric)", Manufacturer=Yageo, Operating Temperature="-55°C ~ 155°C", Power (Watts)="0.1W, 1/10W", Supplier Device Package=0603, Supplier Part Number 1=311-33GRCT-ND, Temperature Coefficient=±100ppm/°C, Tolerance=±5%, ComponentLink1Description=Datasheet, ComponentLink1URL=https://www.yageo.com/upload/media/product/productsearch/datasheet/rchip/PYu-RC_Group_51_RoHS_L_10.pdf, ComponentLink2Description="DigiKey Link", ComponentLink2URL=https://www.digikey.com/en/products/detail/yageo/RC0603JR-0733RL/726771, Composition="Thick Film", Features="Moisture Resistant", Height - Seated (Max)="0.022\" (0.55mm)", lastupdated="2024-07-25 09:19:24", Lifecycle Status=Active, Minimum Order=1, Number of Terminations=2, Package / Case="0603 (1608 Metric)", Packaging=CutTape, Part Number=RC0603JR-0733RL, Part Status=Active, partid=17082, price=0.01, Resistance="33 Ohms", Series=RC_L, Size / Dimension="0.063\" L x 0.031\" W (1.60mm x 0.80mm)", Supplier 1=DigiKey
R4: library part AC0603FR-0722RL, "RES SMD 22 OHM 1% 1/10W 0603", Device Package="0603 (1608 Metric)", Manufacturer=Yageo, Operating Temperature="-55°C ~ 155°C", Power (Watts)="0.1W, 1/10W", Ratings=AEC-Q200, Supplier Device Package=0603, Supplier Part Number 1=YAG3581CT-ND, Temperature Coefficient=±100ppm/°C, Tolerance=±1%, ComponentLink1Description=Datasheet, ComponentLink1URL=https://www.yageo.com/upload/media/product/productsearch/datasheet/rchip/PYu-AC_51_RoHS_L_7.pdf, ComponentLink2Description="DigiKey Link", ComponentLink2URL=https://www.digikey.com/en/products/detail/yageo/AC0603FR-0722RL/5895927, Composition="Thick Film", Features="Automotive AEC-Q200, Moisture Resistant", Height - Seated (Max)="0.022\" (0.55mm)", lastupdated="2024-07-25 09:19:25", Lifecycle Status=Active, Minimum Order=1, Number of Terminations=2, Package / Case="0603 (1608 Metric)", Packaging=CutTape, Part Number=AC0603FR-0722RL, Part Status=Active, partid=16487, price=0.01, Resistance="22 Ohms", Series=AC, Size / Dimension="0.063\" L x 0.031\" W (1.60mm x 0.80mm)", Supplier 1=DigiKey
R5 R6 R7: library part AT0603DRD071KL, "RES SMD 1K OHM 0.5% 1/10W 0603", Device Package="0603 (1608 Metric)", Manufacturer=Yageo, Operating Temperature="-55°C ~ 155°C", Power (Watts)="0.1W, 1/10W", Ratings=AEC-Q200, Supplier Device Package=0603, Supplier Part Number 1=YAG2115CT-ND, Temperature Coefficient=±25ppm/°C, Tolerance=±0.5%, ComponentLink1Description=Datasheet, ComponentLink1URL=http://www.yageo.com/documents/recent/PYu-AT_51_RoHS_L_5.pdf, ComponentLink2Description="DigiKey Link", ComponentLink2URL=https://www.digikey.com/en/products/detail/yageo/AT0603DRD071KL/5138634, Composition="Thin Film", Features="Anti-Sulfur, Automotive AEC-Q200, Moisture Resistant", Height - Seated (Max)="0.022\" (0.55mm)", lastupdated="2024-07-25 09:19:32", Lifecycle Status=Active, Minimum Order=1, Number of Terminations=2, Package / Case="0603 (1608 Metric)", Packaging=TapeAndReel, Part Number=AT0603DRD071KL, Part Status=Active, partid=4899, price=0.02, Resistance="1 kOhms", Series=AT, Size / Dimension="0.063\" L x 0.031\" W (1.60mm x 0.80mm)", Supplier 1=DigiKey
R8 R27: library part RT0603FRE0747KL, "RES SMD 47K OHM 1% 1/10W 0603", Device Package="0603 (1608 Metric)", Manufacturer=Yageo, Operating Temperature="-55°C ~ 155°C", Power (Watts)="0.1W, 1/10W", Supplier Device Package=0603, Supplier Part Number 1=YAG3355CT-ND, Temperature Coefficient=±50ppm/°C, Tolerance=±1%, ComponentLink1Description=Datasheet, ComponentLink1URL=https://www.yageo.com/upload/media/product/productsearch/datasheet/rchip/PYu-RT_1-to-0.01_RoHS_L_11.pdf, ComponentLink2Description="DigiKey Link", ComponentLink2URL=https://www.digikey.com/en/products/detail/yageo/RT0603FRE0747KL/1075386, Composition="Thin Film", Height - Seated (Max)="0.022\" (0.55mm)", lastupdated="2024-07-25 09:19:32", Lifecycle Status=Active, Minimum Order=1, Number of Terminations=2, Package / Case="0603 (1608 Metric)", Packaging=TapeAndReel, Part Number=RT0603FRE0747KL, Part Status=Active, partid=5674, price=0.01, Resistance="47 kOhms", Series=RT, Size / Dimension="0.063\" L x 0.031\" W (1.60mm x 0.80mm)", Supplier 1=DigiKey
R9 R12 R13 R14: library part AC0603JR-0710KL, "RES SMD 10K OHM 5% 1/10W 0603", Device Package="0603 (1608 Metric)", Manufacturer=Yageo, Operating Temperature="-55°C ~ 155°C", Power (Watts)="0.1W, 1/10W", Ratings=AEC-Q200, Supplier Device Package=0603, Supplier Part Number 1=311-10KLECT-ND, Temperature Coefficient=±100ppm/°C, Tolerance=±5%, ComponentLink1Description=Datasheet, ComponentLink1URL=https://www.yageo.com/upload/media/product/productsearch/datasheet/rchip/PYu-AC_51_RoHS_L_7.pdf, ComponentLink2Description="DigiKey Link", ComponentLink2URL=https://www.digikey.com/en/products/detail/yageo/AC0603JR-0710KL/2827830, Composition="Thick Film", Features="Automotive AEC-Q200, Moisture Resistant", Height - Seated (Max)="0.022\" (0.55mm)", lastupdated="2024-07-25 09:19:28", Lifecycle Status=Active, Minimum Order=1, Number of Terminations=2, Package / Case="0603 (1608 Metric)", Packaging=CutTape, Part Number=AC0603JR-0710KL, Part Status=Active, partid=12247, price=0.01, Resistance="10 kOhms", Series=AC, Size / Dimension="0.063\" L x 0.031\" W (1.60mm x 0.80mm)", Supplier 1=DigiKey
R10: library part RT0603DRE07120RL, "RES SMD 120 OHM 0.5% 1/10W 0603", Device Package="0603 (1608 Metric)", Manufacturer=Yageo, Operating Temperature="-55°C ~ 155°C", Power (Watts)="0.1W, 1/10W", Supplier Device Package=0603, Supplier Part Number 1=311-2409-1-ND, Temperature Coefficient=±50ppm/°C, Tolerance=±0.5%, ComponentLink1Description=Datasheet, ComponentLink1URL=https://www.yageo.com/upload/media/product/productsearch/datasheet/rchip/PYu-RT_1-to-0.01_RoHS_L_11.pdf, ComponentLink2Description="DigiKey Link", ComponentLink2URL=https://www.digikey.com/en/products/detail/yageo/RT0603DRE07120RL/1074551, Composition="Thin Film", Height - Seated (Max)="0.022\" (0.55mm)", lastupdated="2024-07-25 09:19:30", Lifecycle Status=Active, Minimum Order=1, Number of Terminations=2, Package / Case="0603 (1608 Metric)", Packaging=TapeAndReel, Part Number=RT0603DRE07120RL, Part Status=Active, partid=9567, price=0.01, Resistance="120 Ohms", Series=RT, Size / Dimension="0.063\" L x 0.031\" W (1.60mm x 0.80mm)", Supplier 1=DigiKey
R11: library part RT0603DRE07169RL, "RES SMD 169 OHM 0.5% 1/10W 0603", Device Package="0603 (1608 Metric)", Manufacturer=Yageo, Operating Temperature="-55°C ~ 155°C", Power (Watts)="0.1W, 1/10W", Supplier Device Package=0603, Supplier Part Number 1=311-2439-1-ND, Temperature Coefficient=±50ppm/°C, Tolerance=±0.5%, ComponentLink1Description=Datasheet, ComponentLink1URL=https://www.yageo.com/upload/media/product/productsearch/datasheet/rchip/PYu-RT_1-to-0.01_RoHS_L_11.pdf, ComponentLink2Description="DigiKey Link", ComponentLink2URL=https://www.digikey.com/en/products/detail/yageo/RT0603DRE07169RL/1074609, Composition="Thin Film", Height - Seated (Max)="0.022\" (0.55mm)", lastupdated="2024-07-25 09:19:29", Lifecycle Status=Active, Minimum Order=1, Number of Terminations=2, Package / Case="0603 (1608 Metric)", Packaging=TapeAndReel, Part Number=RT0603DRE07169RL, Part Status=Active, partid=10004, price=0.01, Resistance="169 Ohms", Series=RT, Size / Dimension="0.063\" L x 0.031\" W (1.60mm x 0.80mm)", Supplier 1=DigiKey
R15_1 R15_2: library part AC0603FR-0710KL, "RES SMD 10K OHM 1% 1/10W 0603", Device Package="0603 (1608 Metric)", Manufacturer=Yageo, Operating Temperature="-55°C ~ 155°C", Power (Watts)="0.1W, 1/10W", Ratings=AEC-Q200, Supplier Device Package=0603, Supplier Part Number 1=311-10KLDCT-ND, Temperature Coefficient=±100ppm/°C, Tolerance=±1%, ComponentLink1Description=Datasheet, ComponentLink1URL=https://www.yageo.com/upload/media/product/productsearch/datasheet/rchip/PYu-AC_51_RoHS_L_7.pdf, ComponentLink2Description="DigiKey Link", ComponentLink2URL=https://www.digikey.com/en/products/detail/yageo/AC0603FR-0710KL/2827814, Composition="Thick Film", Features="Automotive AEC-Q200, Moisture Resistant", Height - Seated (Max)="0.022\" (0.55mm)", lastupdated="2024-07-25 09:19:24", Lifecycle Status=Active, Minimum Order=1, Number of Terminations=2, Package / Case="0603 (1608 Metric)", Packaging=CutTape, Part Number=AC0603FR-0710KL, Part Status=Active, partid=17347, price=0.01, Resistance="10 kOhms", Series=AC, Size / Dimension="0.063\" L x 0.031\" W (1.60mm x 0.80mm)", Supplier 1=DigiKey